# EAGLE board Esquema (EAGLE 9.6.2)
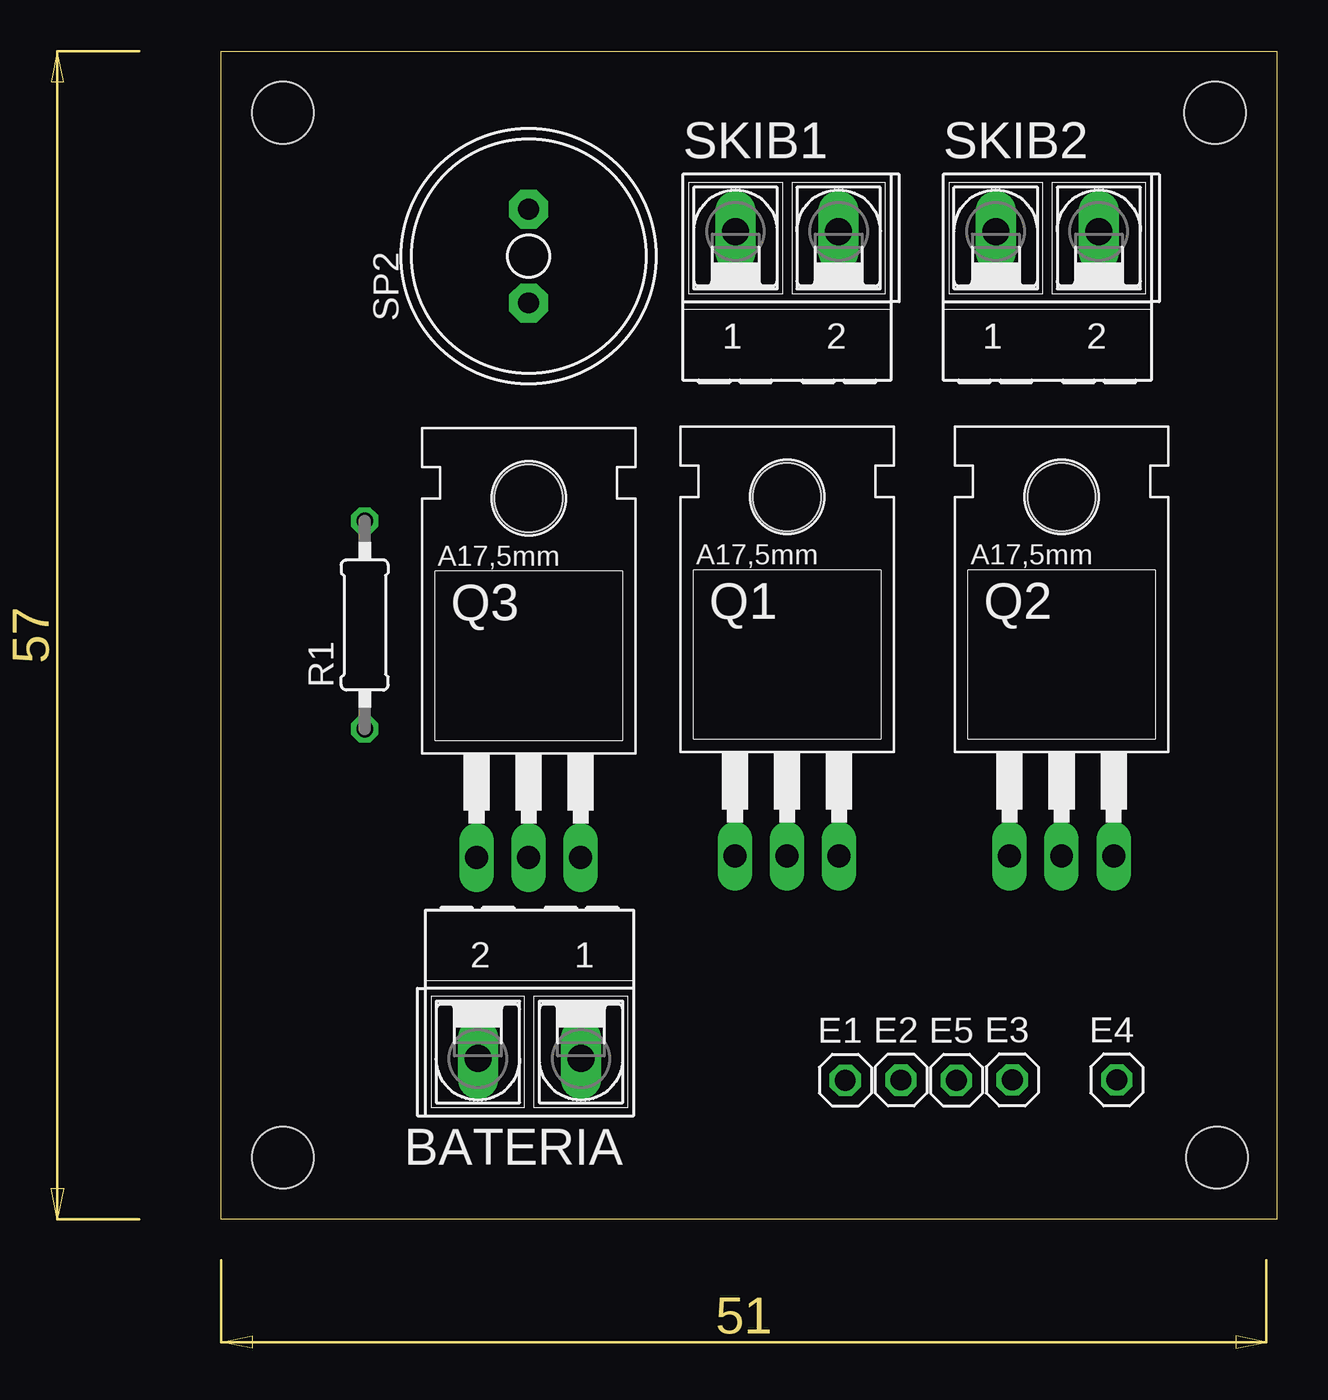
[diagram p0: board, top side]
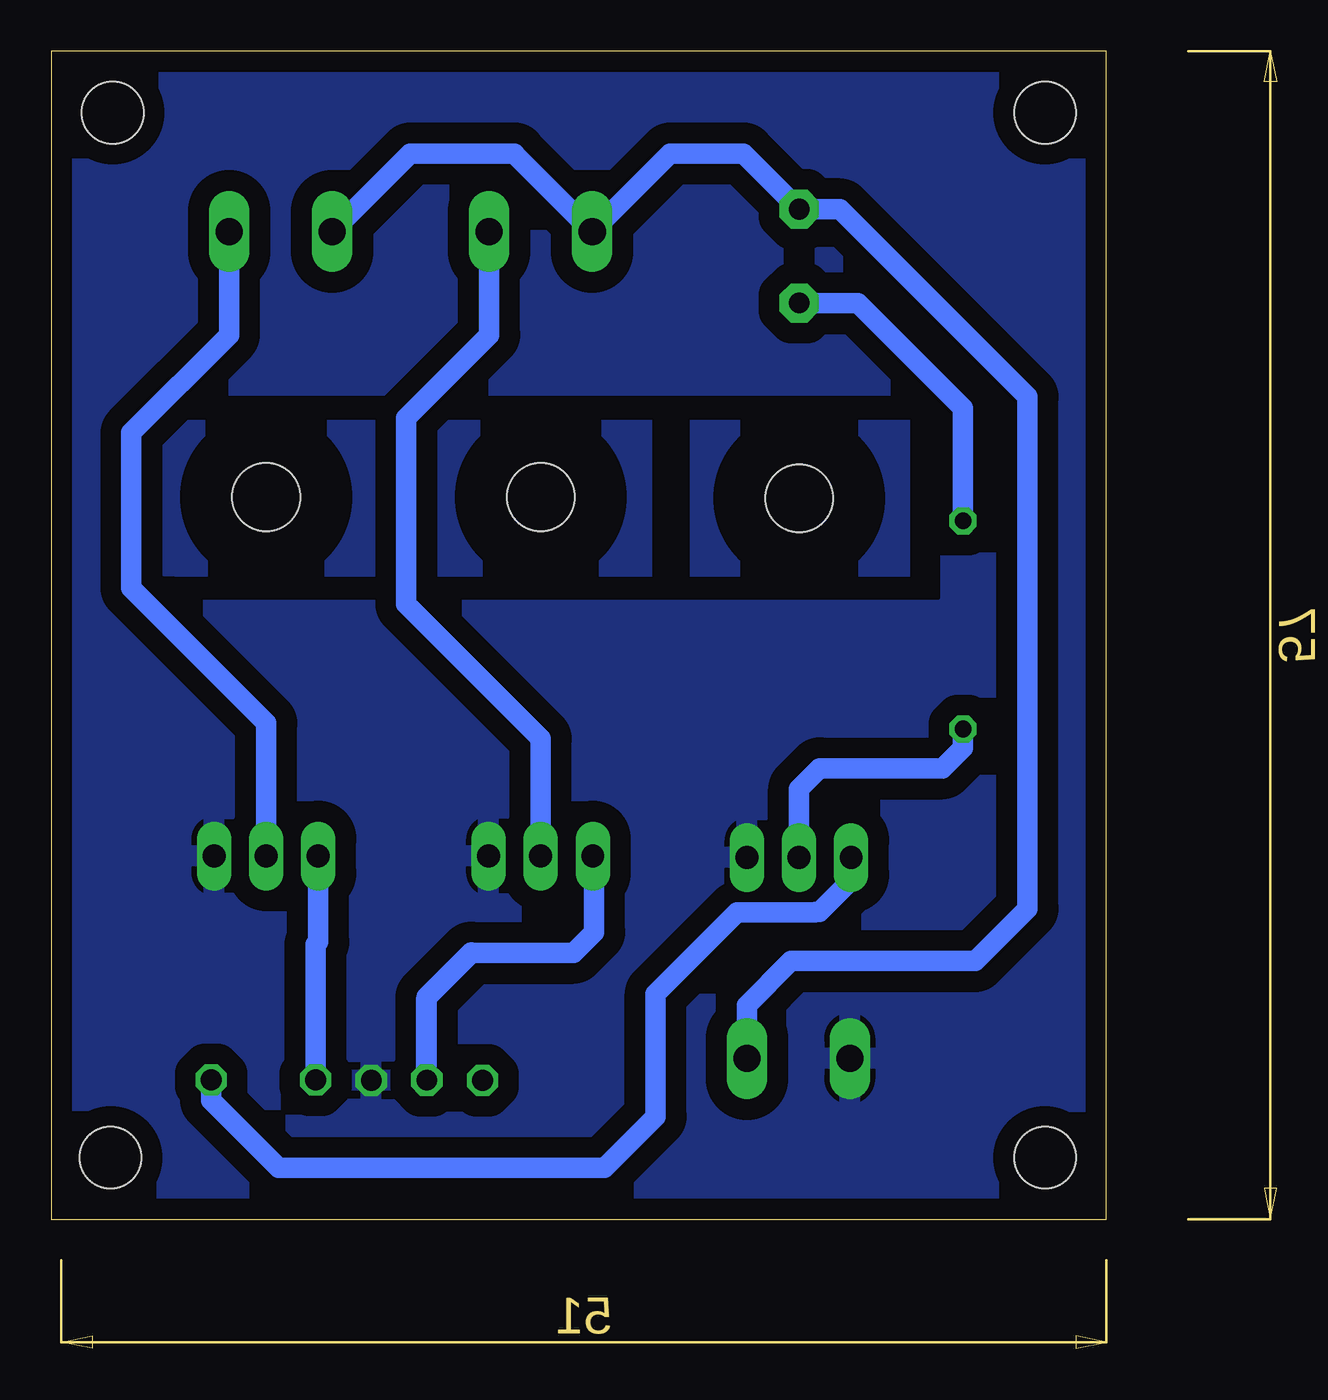
[diagram p1: board, bottom side, seen from below]

Size 51.5 x 57 mm. Coordinates in mm from the lower left corner, seen from the top.
Outline: 51.5,0 0,0 0,57 51.5,57 51.5,0
Copper layers (1*16): Top 0.035mm / dielectric 1.5mm / Bottom 0.035mm
Design rules "default *": minimum track width 1mm, minimum drill 0.35mm, track to track 40mil, track to pad 10mil, pad to pad 10mil, via to via 10mil, smd to smd 6mil, copper to edge 40mil, drill to drill 6mil, minimum pad ring 10mil, minimum via ring 8mil, stop-mask expansion 4mil, vias tented up to drill 0mil, thermal gap 10mil
Holes 3 mm at 3,54 48.5,54 3,3 48.6,3

## Footprints (pad centres in the part's own frame; a part is rotated, then mirrored left to right if it is on the bottom)
AK500/2-H = drill 1.321 long: 1 -2.515,0; 2 2.515,0
1X01 = drill 1.016 octagon: 1 0,0
TO220 = drill 1.118 long: 1 -2.54,-6.35; 2 0,-6.35; 3 2.54,-6.35 | hole 3.302: 0,11.176
0207/10 = drill 0.813 octagon: 1 -5.08,0; 2 5.08,0
AL11P = drill 1.016 pad 1.905 octagon: + 2.286,0; - -2.286,0

## Placement (x,y rotation side)
BATERIA  [AK500/2-H]  15.04,7.84 180 top
E1  3V3  [1X01]  30.45,6.78 0 top
E2  SKIB1  [1X01]  33.17,6.79 0 top
E3  SKIB2  [1X01]  38.6,6.8 0 top
E4  BUZZER  [1X01]  43.7,6.8 0 top
E5  GND  [1X01]  35.88,6.78 0 top
Q1  IRF540  [TO220]  27.61,24.07 0 top
Q2  IRF540  [TO220]  41.01,24.07 0 top
Q3  IRF540  [TO220]  15,24 0 top
R1  330  [0207/10]  7,29 90 top
SKIB1  [AK500/2-H]  27.61,48.2 0 top
SKIB2  [AK500/2-H]  40.31,48.2 0 top
SP2  AL11P  [AL11P]  15,47 90 top

## Library data of the parts
BATERIA SKIB1 SKIB2 = con-ptr500; OC_FARNELL: unknown; OC_NEWARK: unknown
E1-E5 = pinhead
Q1-Q3 = transistor-fet
R1 = rcl; SPICEPREFIX: R
SP2 = buzzer; OC_FARNELL: unknown; OC_NEWARK: unknown

## Nets
3.3V: E1.1
BUZZER: E4.1 Q3.1
GND: BATERIA.2 E5.1 Q1.3 Q2.3 Q3.3
N$2: Q3.2 R1.1
N$4: R1.2 SP2.-
S1: Q1.2 SKIB1.2
S2: Q2.2 SKIB2.2
SKIB1: E2.1 Q1.1
SKIB2: E3.1 Q2.1
VCC: BATERIA.1 SKIB1.1 SKIB2.1 SP2.+

## Tracks (layer width: path | path; a pad name or v marks a point on that pad's centre or on a via)
BUZZER
  Bottom 1: E4.1 43.7,5.8 40.4,2.5 24.5,2.5 22,5 22,11 18.03,14.97 14.24,14.97 14.21,15 14,15 12.46,16.54 Q3.1
DS
  cutout Bottom: 44.6,40.1 45.4,39.3 45.4,39.1 9.8,39.1 10.8,40.1
  cutout Bottom: 45.5,31.3 9.5,31.3 9.5,38.7 9.4,38.8 8.2,37.6 8.2,30.3 44.5,30.3
  cutout Bottom: 22.1,38.9 22.1,31.5 20.4,31.5 20.4,38.9
GND
  pour Bottom: 51,56 51,1 1,1 1,56
N$2
  Bottom 1: Q3.2 15,21 14,22 8,22 7,23 R1.1
N$4
  Bottom 1: R1.2 7,39.58 12.13,44.71 SP2.-
S1
  Bottom 1: Q1.2 27.61,23.45 34.17,30.01 34.17,39.1 30.12,43.15 SKIB1.2
S2
  Bottom 1: Q2.2 41.01,24.21 47.59,30.79 47.59,38.38 42.83,43.15 SKIB2.2
SKIB1
  Bottom 1: 31,13 26,13 25,14 25,17.65 Q1.1
  Bottom 1.016: E2.1 33.17,10.83 31,13
SKIB2
  Bottom 1: E3.1 38.6,13.4 38.47,13.53 Q2.1
VCC
  Bottom 1: SKIB2.1 33.98,52.01 28.88,52.01 28.88,51.98 SKIB1.1 21.3,52 17.71,52 SP2.+ 13,49.29 3.86,40.14 3.86,15.14 6.4,12.6 15.4,12.6 17.55,10.45 BATERIA.1